# Altium PCB main_pcb_new_id.PcbDoc (part 1 of 2)
Units mil, origin at the board's own origin, x right, y up, seen from the top; angles counter-clockwise.
Board outline 3546.59 x 5237.31 mil, 2 copper layers (Top Layer, Bottom Layer); 111 components, 96 nets, 453 pads, 145 vias.
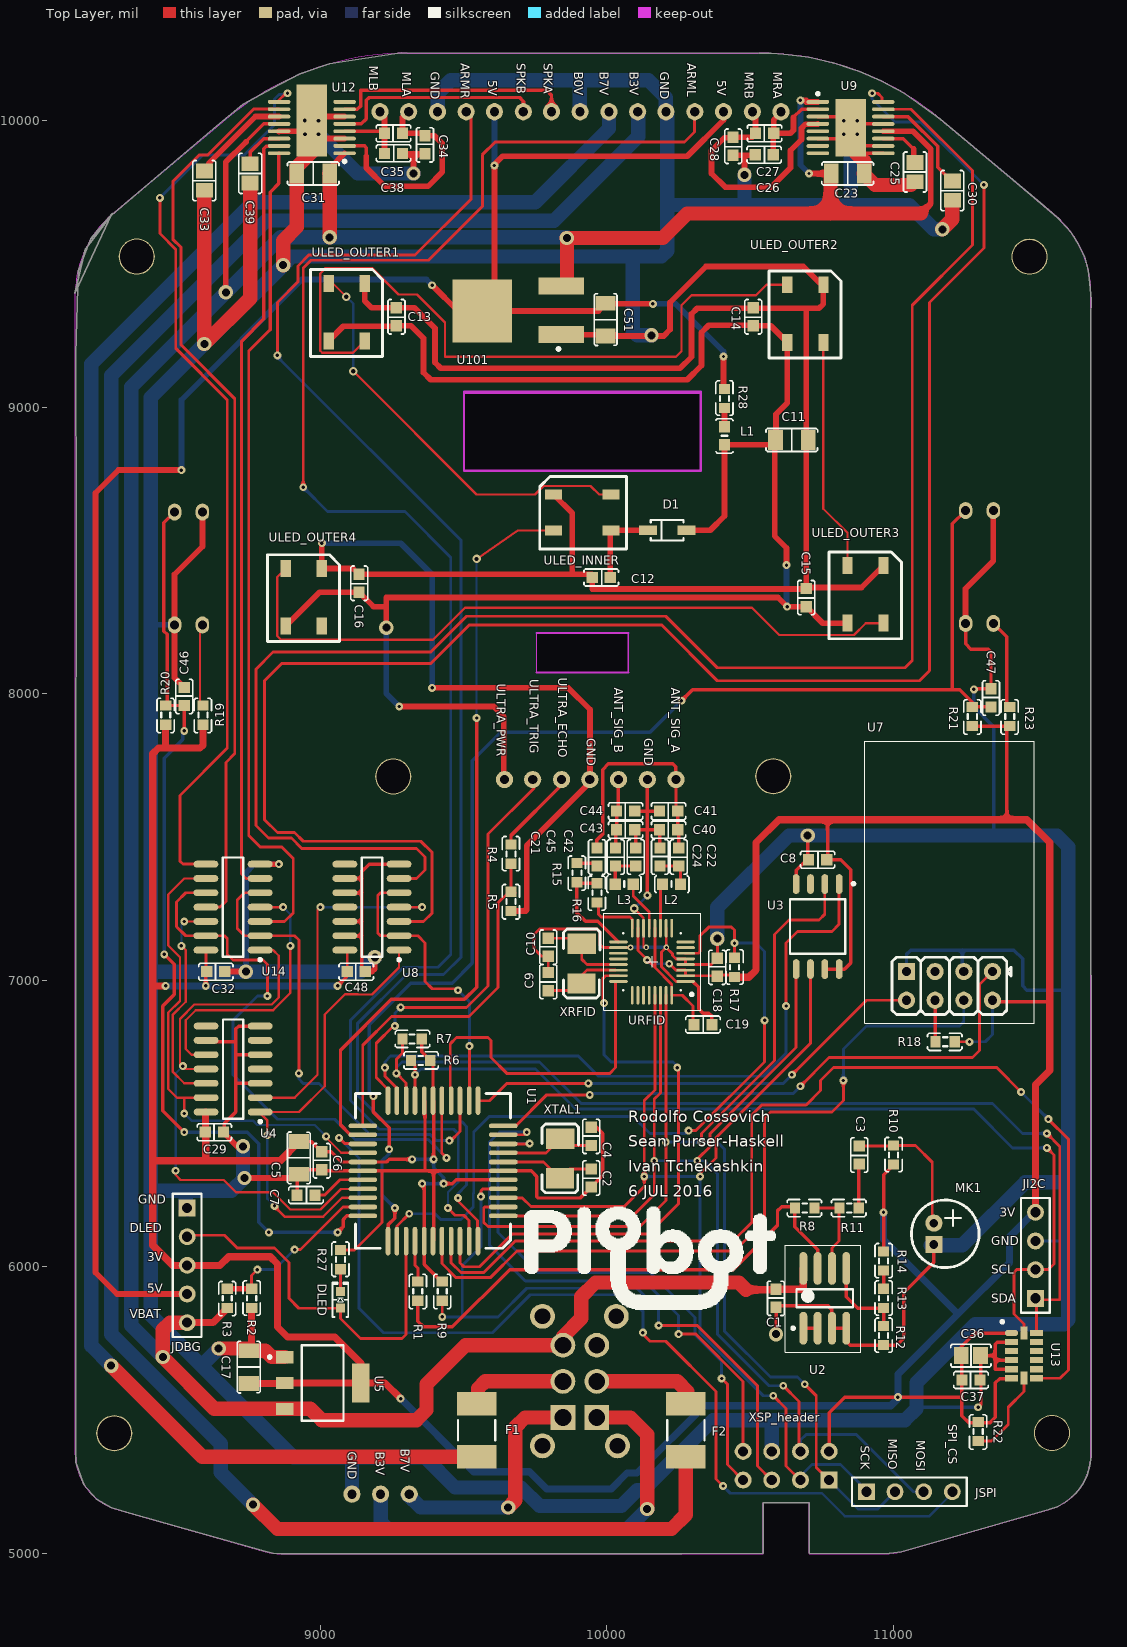
[diagram p0: Top Layer view]
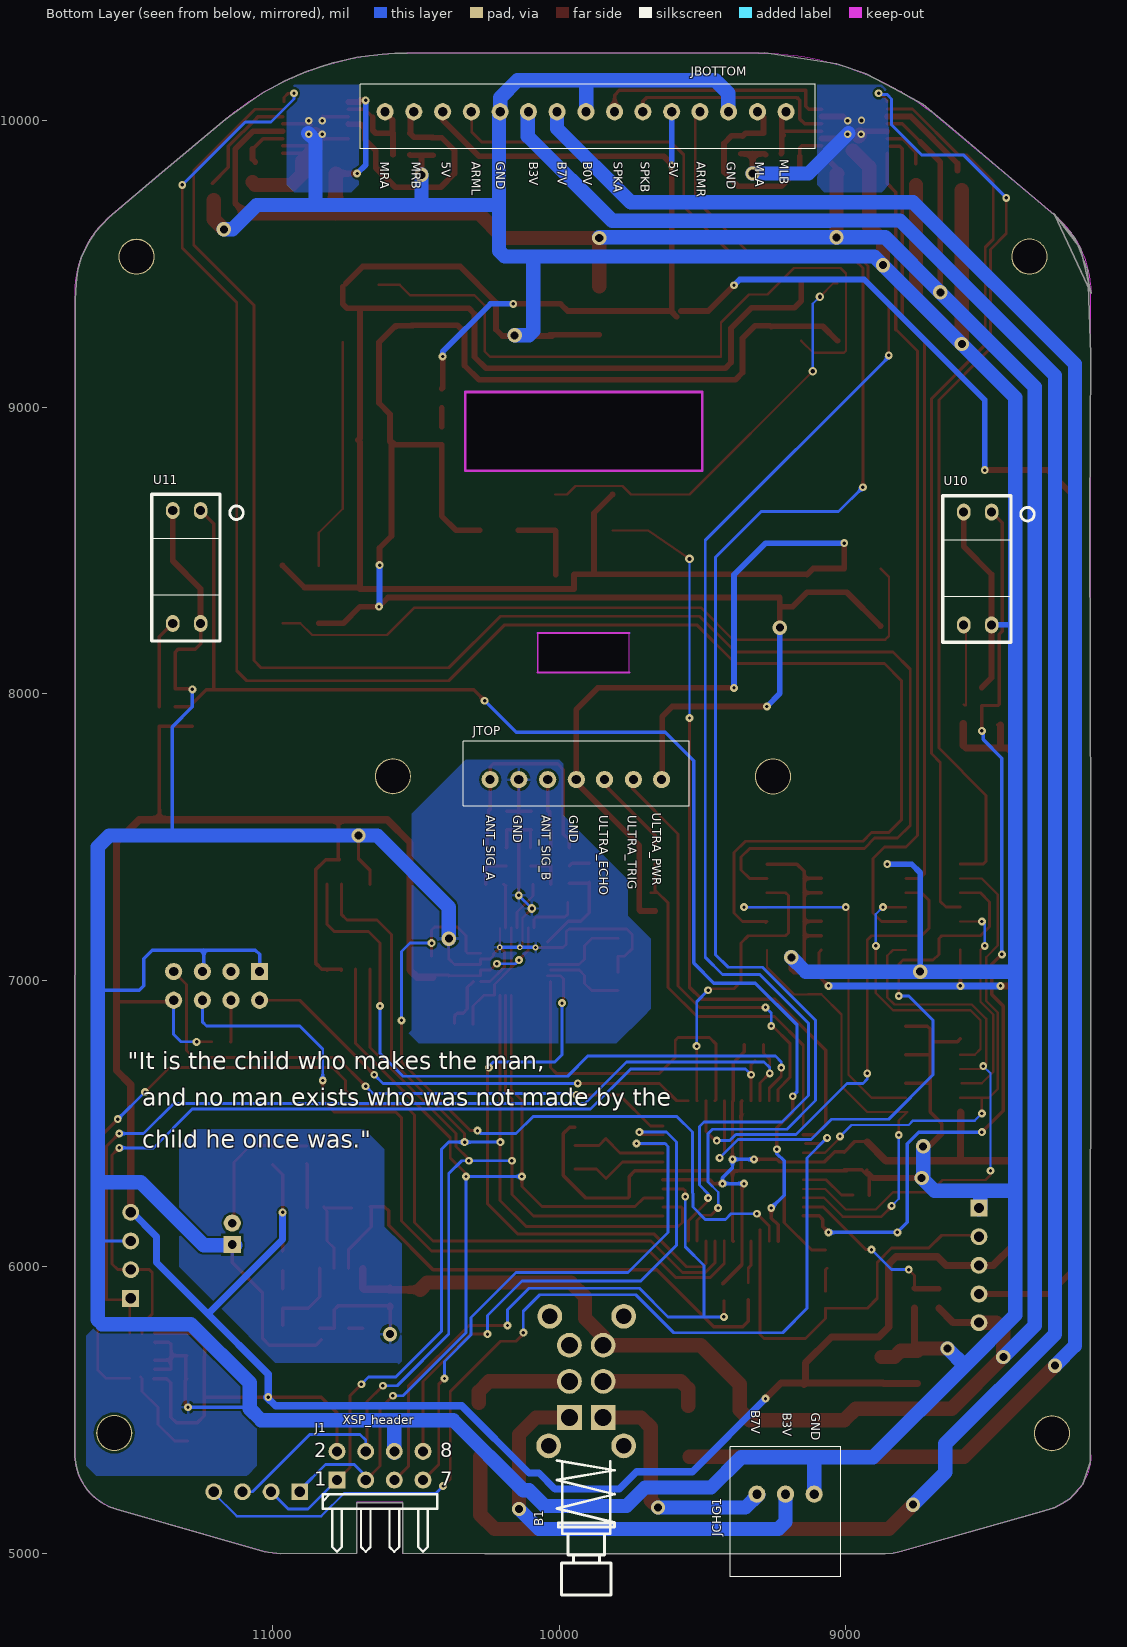
[diagram p1: Bottom Layer view, seen from below]

## Layer stack, top to bottom
Top Solder: solder mask 0.4, Solder Resist, Dk 3.5
Top Layer: signal copper 1.4
Dielectric1: dielectric 12.6, FR-4, Dk 4.8
Bottom Layer: signal copper 1.4
Bottom Solder: solder mask 0.4, Solder Resist, Dk 3.5

## Board outline
8143.2,9396.15 8179.07,9549.45 8271.79,9670.14 8637.89,9980.25 8730.23,10056.09 8832.48,10112.18 8928.41,10163.22 9031.25,10198.55 9282.58,10235.79 10529.94,10233.93 10572.83,10234.83 10617.21,10231.57 10662.22,10225.7 10705.76,10220.43 10794.61,10199.42 10837.6,10185.09 10784.1,10203.24 10856.7,10179.35 10879.63,10171.71 10956.26,10139.14 11038.17,10094.09 11163.57,10004.43 11395.9,9810.1 11513.6,9711.32 11570.35,9661.92 11617.19,9612.11 11644.89,9569.17 11667.92,9521.86 11679.71,9477.01 11684.85,9432.16 11689.02,9373.57 11688.53,9315.23 11688.04,9191.69 11688.53,8698.01 11689.79,5339.45 11685.15,5304.98 11675.77,5273.61 11661.37,5243.36 11644.62,5219.58 11633.58,5207.2 11622.53,5196.82 11597.75,5177.4 11571.63,5163.34 11544.58,5153.27 11028.88,5006.19 10971.98,4998.48 10705.76,5000.34 10705.76,5177.4 10625,5177.4 10545,5177.4 10545,5000.34 10260,4998.48 8861.77,4998.48 8834.18,5000.34 8806.48,5007.02 8720.49,5031.86 8527.51,5085.36 8323.76,5143.29 8271.65,5159.79 8218.67,5189.32 8173.51,5240.56 8146.93,5318.96 8145.68,7501.43 8147.94,8611.99 8145.68,9184.18 8154.7,9474.77 8199.05,9587.28 8273.52,9675.41 8180.13,9552.59 8145.22,9398.71 8271.66,9673.55
cut-out: 9501.22,9048.82 10327.99,9048.82 10326.01,8776.23 9501.32,8777.77
cut-out: 9755,8211.79 10075,8210 10075,8075 9755,8074

## Design rules (kind name [scope] priority, off if disabled: settings)
Clearance [All] p1: gap=8
FabricationTestpoint [(IsPad And (OnTopLayer Or OnBottomLayer))] p1: side=3 testpointundercomponent=TRUE minsize=40 maxsize=100 preferedsize=60 minholesize=0 maxholesize=40 preferedholesize=32 testpointgrid=1 allowsidetop=TRUE allowsidebottom=TRUE usegrid=TRUE gridtolerance=0.01
HoleSize [All] p1: absolutevalues=TRUE maxlimit=150 minlimit=1 maxpercent=80.000 minpercent=20.000
MinimumSolderMaskSliver [All] p1: minsoldermaskwidth=5
PolygonConnect [All] p1: connectstyle=Relief reliefconductorwidth=10 reliefentries=4 polygonreliefangle="90 Angle" airgapwidth=10
RoomDefinition main_pcb [InComponentClass('main_pcb')] p1 off: confinementstyle=ConfineIn formatcopy=TRUE lockcomponents=FALSE outline 11735,5015 11930,5015 11930,5255 11735,5255
RoutingVias [All] p1: holewidth=11.81 width=27.56 viastyle="Through Hole" minholewidth=3.94 minwidth=3.94 maxholewidth=28 maxwidth=50
SilkToSilkClearance [All] p1: silktosilkclearance=1
SilkToSolderMaskClearance [IsPad] p1: minsilkscreentomaskgap=1 clearancetoexposedcopper=TRUE
SolderMaskExpansion [All] p1: expansion=0
Width [All] p1: maxlimit=1000 minlimit=8 preferedwidth=10 minimp=50.000000 maximp=50.000000 favimp=50.000000
25 further rules are at their usual default settings.

## Components (designator, comment, footprint, x,y, rotation, side; value= is the part's Value field where it differs from the comment)
B1 "ON/OFF" KGPS22F03 9898.71,5604.03 r0 bottom
C1 "100nF" CAPC1608N 10590,5890 r270 top
C2 "18pF" CAPC1608N 9945,6310 r90 top
C3 "100nF" CAPC1608N 10880,6390 r90 top
C4 "18pF" CAPC1608N 9945,6455 r270 top
C5 "10 uF" CAPC3216N 8925,6380 r90 top
C6 "100nF" CAPC1608N 9005,6370 r270 top
C7 "100nF" CAPC1608N 8950,6250 r180 top
C8 "100nF" CAPC1608N 10735,7420 r180 top
C9 "15pF" CAPC1608N 9795,6995 r90 top
C10 "15pF" CAPC1608N 9795,7115 r270 top
C11 "10 uF" CAPC3216N 10645,8885 r0 top
C12 "100nF" CAPC1608N 9980,8405 r180 top
C13 "100nF" CAPC1608N 9265,9315 r90 top
C14 "100nF" CAPC1608N 10510,9315 r90 top
C15 "100nF" CAPC1608N 10695,8335 r90 top
C16 "100nF" CAPC1608N 9135,8385 r90 top
C17 "10uF" CAPC3216N 8750,5650 r90 top
C18 "100nF" CAPC1608N 10385,7045 r270 top
C19 "100nF" CAPC1608N 10335,6845 r180 top
C21 "100nF" CAPC1608N 9965,7430 r90 top
C22 "15pF" CAPC1608N 10250,7430 r90 top
C23 "10uF" CAPC3216N 10840,9815 r180 top
C24 "47pF" CAPC1608N 10185,7430 r270 top
C25 "10nF/16V" CAPC2012N 11075,9820 r90 top
C26 "100nF" CAPC1608N 10548.5,9880 r180 top
C27 "100nF" CAPC1608N 10550,9955 r0 top
C28 "100nF" CAPC1608N 10440,9910 r90 top
C29 "100nF" CAPC1608N 8630,6470 r0 top
C30 "2.2uF" CAPC2012N 11205,9755 r90 top
C31 "10uF" CAPC3216N 8975,9815 r0 top
C32 "100nF" CAPC1608N 8635,7030 r0 top
C33 "10nF/16V" CAPC2012N 8595,9790 r90 top
C34 "100nF" CAPC1608N 9365,9915 r270 top
C35 "100nF" CAPC1608N 9255,9955 r0 top
C36 "1uF" CAPC2012N 11270,5690 r0 top
C37 "100nF" CAPC1608N 11270,5605 r0 top
C38 "100nF" CAPC1608N 9255,9885 r180 top
C39 "2.2uF" CAPC2012N 8755,9815 r90 top
C40 "180pF" CAPC1608N 10215,7525 r0 top
C41 "10pF" CAPC1608N 10215,7590 r0 top
C42 "47pF" CAPC1608N 10100,7430 r90 top
C43 "180pF" CAPC1608N 10065,7525 r0 top
C44 "10pF" CAPC1608N 10065,7590 r0 top
C45 "15pF" CAPC1608N 10030,7430 r90 top
C46 "100nF" CAPC1608N 8525,7990 r270 top
C47 "100nF" CAPC1608N 11340,7985 r270 top
C48 "100nF" CAPC1608N 9125,7030 r0 top
C51 "10uF" CAPC3216N 9995,9305 r90 top
D1 "MBR0540" SOD123/X.85 10210,8570 r0 top
DLED "LED3" "LED 0603/1608 BLUE" 9070,5885 r90 top
F1 "miniSMDC260F/12" miniSMDC260F/12 9545,5430 r90 top
F2 "miniSMDC260F/12" miniSMDC260F/12 10275,5430 r90 top
J1 "XSP" HDR2X4H 10775,5255.85 r180 bottom locked
JBOTTOM "Header 15" B15B-XH-A 9430,10030.32 r90 bottom locked
JCHG1 "Charger" S3B-XH-A(LF)(SN) 9210,4990 r90 bottom locked
JDBG "Header 5" HDR1X5 8535,6205 r270 top
JI2C "Header 4" HDR1X4 11495,5890 r90 top
JSPI "Header 4" HDR1X4 10905,5215 r0 top
JTOP "Header 7" B7B-XH-A 8991.18,7833.86 r270 bottom
L1 "10uH" INDC1608N 10410,8900 r270 top
L2 "2.2uH" INDC1608N 10225,7335 r0 top
L3 "2.2uH" INDC1608N 10060,7335 r180 top
MK1 "Mic2" electret_6mm 11180,6115 r90 top
R1 "10k" RESC1608N 9340,5915 r270 top
R2 "10k" RESC1608N 8760,5890 r90 top
R3 "20k" RESC1608N 8675,5890 r270 top
R4 "10k" RESC1608N 9665,7440 r90 top
R5 "10K" RESC1608N 9665,7275 r270 top
R6 "10k" RESC1608N 9350,6720 r0 top
R7 "10k" RESC1608N 9320,6795 r0 top
R8 "100k" RESC1608N 10690,6205 r180 top
R9 "10k" RESC1608N 9425,5915 r270 top
R10 "3.3k" RESC1608N 11000,6390 r90 top
R11 "22" RESC1608N 10845,6205 r180 top
R12 "10k" RESC1608N 10965,5760 r90 top
R13 "10k" RESC1608N 10965,5890 r90 top
R14 "10k" RESC1608N 10965,6020 r90 top
R15 "820" RESC1608N 9965,7305 r270 top
R16 "5.1k" RESC1608N 9895,7375 r270 top
R17 "10k" RESC1608N 10445,7045 r90 top
R18 "10k" RESC1608N 11180,6785 r180 top
R19 "1K" RESC1608N 8590,7925 r270 top
R20 "5.1k" RESC1608N 8460,7925 r270 top
R21 "5.1k" RESC1608N 11275,7920 r270 top
R22 "10k" RESC1608N 11295,5425 r270 top
R23 "1K" RESC1608N 11405,7920 r270 top
R27 "470" RESC1608N 9070,6025 r90 top
R28 "1" RESC1608N 10410,9030 r90 top
U1 "MCU" atmega644p 9355,6345 r270 top
U2 "LM358D" LM358D 10760,5890 r90 top
U3 "W25Q64BVSIG" W25Q64BVSIG 10730,7190 r270 top
U4 "SN74HC04D" D014_N 8695.51,6690 r180 top
U5 "AZ1117CH-3.3" SOT223 8995,5605 r180 top
U7 "ESP8266" ESP8266 11135.88,6979.94 r90 top
U8 "SN74HC08D" D014_N 9180,7255 r180 top
U9 "DRV8833" DRV8833#1 10850,9975 r0 top
U10 "ITR9608" ITR9608 8562.62,8409.71 r180 bottom
U11 "ITR9608" ITR9608 11322.62,8414.71 r180 bottom
U12 "DRV8833" DRV8833#2 8970,9975 r180 top
U13 "ADXL345BCCZ" ADXL345 11455,5690 r0 top
U14 "SN74HC08D" D014_N 8695,7255 r180 top
U101 "AZ1084CD-5.0" AZ1084CD-5.0 9675.24,9335 r180 top
ULED_INNER "WS2812B" WS2812B 9915,8635 r180 top
ULED_OUTER1 "WS2812B" WS2812B 9095,9330 r90 top
ULED_OUTER2 "WS2812B" WS2812B 10695,9325 r90 top
ULED_OUTER3 "WS2812B" WS2812B 10905,8345 r90 top
ULED_OUTER4 "WS2812B" WS2812B 8945,8335 r90 top
URFID "MFRC52202HN1" MFRC52202HN1 10157.13,7064.53 r180 top
XRFID "7A-27.120MAAJ-T" XTAL 9925,7055 r90 top
XTAL1 "ABM7-8.000MHZ-D2Y-T" XTAL 9850,6375 r90 top

## Footprints (in the part's own frame and the unit in brackets; to place one, negate y for a bottom-side part, rotate by r counter-clockwise, add the part's x,y. Pads: shape width x height; smd on the part's side, far side on the other; paste and mask are expansions set on the pad)
ADXL345 [mm] "BGA, 14-Leads, Body 5.0x3.0mm,  Pitch 0.80mm"
  oct 1.145x0.55 smd: 1(-1.1,2)
  rect 1.145x0.55 smd: 2(-1.1,1.2) 3(-1.1,0.4) 4(-1.1,-0.4) 5(-1.1,-1.2) 6(-1.1,-2) 8(1.1,-2) 9(1.1,-1.2) 10(1.1,-0.4) 11(1.1,0.4) 12(1.1,1.2) 13(1.1,2)
  rect 0.6x1.145 smd: 7(0,-2) 14(0,2)
  silkscreen extent -2.05,2.88 -1.8,3.12, body extent -1.5,-2.5 1.5,2.5, height 1
atmega644p [mil]
  oval 16x100 smd: 1(167.45,282.95) 2(136.45,282.95) 3(104.45,282.95) 4(73.45,282.95) 5(41.45,282.95) 6(10.45,282.95) 7(-20.55,282.95) 8(-52.55,282.95) 9(-83.55,282.95) 10(-115.55,282.95) 11(-146.55,282.95) 23(-146.55,-207.05) 24(-115.55,-207.05) 25(-83.55,-207.05) 26(-52.55,-207.05) 27(-20.55,-207.05) 28(10.45,-207.05) 29(41.45,-207.05) 30(73.45,-207.05) 31(104.45,-207.05) 32(136.45,-207.05) 33(167.45,-207.05)
  oval 100x16 smd: 12(-234.55,194.95) 13(-234.55,163.95) 14(-234.55,131.95) 15(-234.55,100.95) 16(-234.55,68.95) 17(-234.55,37.95) 18(-234.55,6.95) 19(-234.55,-25.05) 20(-234.55,-56.05) 21(-234.55,-88.05) 22(-234.55,-119.05) 34(255.45,-119.05) 35(255.45,-88.05) 36(255.45,-56.05) 37(255.45,-25.05) 38(255.45,6.95) 39(255.45,37.95) 40(255.45,68.95) 41(255.45,100.95) 42(255.45,131.95) 43(255.45,163.95) 44(255.45,194.95)
  silkscreen extent -260,-232 280,308, body extent -183,-162 227,244, height 39
AZ1084CD-5.0 [mm] "D-PAK, 3-Pads, Body 6.2x6.7mm (max), IPC Low Density"
  rect 4x1.5 smd: 1(-4.2,2.1) 3(-4.2,-2.2)
  rect 5.25x5.6 smd: 2(2.8,0)
  silkscreen extent -4.08,3.24 -3.83,3.49, body extent -3.05,-3.35 3.15,3.35, height 2.38
B7B-XH-A [mil]
  round 60 hole 32: 1(133.86,-1249.61) 2(133.86,-1149.61) 3(133.86,-1048.82) 4(133.86,-948.82) 5(133.86,-850.39) 6(133.86,-749.61) 7(133.86,-651.18)
  silkscreen extent 0,-1343 226,-555
B15B-XH-A [mil]
  round 60 hole 32: 1(0,-222.05) 2(0,-122.05) 3(0,-21.26) 4(0,78.74) 5(0,177.17) 6(0,277.95) 7(0,376.38) 8(0,476.38) 9(0,577.17) 10(0,677.17) 11(0,775.59) 12(0,876.38) 13(0,976.38) 14(0,1077.17) 15(0,1177.17)
  silkscreen extent -130,-323 96,1264
CAPC1608N [mm]
  rect 1x1 smd: 1(-0.8,0) 2(0.8,0)
  silkscreen extent -1.52,-0.76 1.52,0.75, body extent -0.87,-0.48 0.87,0.48, height 0.85
CAPC2012N [mm]
  rect 1.3x1.5 smd: 1(-0.85,0) 2(0.85,0)
  silkscreen extent -1.78,-1.02 1.78,1.02, body extent -1.1,-0.72 1.1,0.72, height 1.1
CAPC3216N [mm] "Chip Capacitor, Body 3.2x1.6mm, IPC Medium Density"
  rect 1.3x1.8 smd: 1(-1.45,0) 2(1.45,0)
  silkscreen extent -2.29,-1.02 2.29,1.02, body extent -1.7,-0.9 1.7,0.9, height 1.35
D014_N [mm] "SOIC, 14-Leads, Body 8.7x3.9mm, Pitch 1.27mm, IPC Medium Density"
  oval 2.2x0.6 smd: 1(-2.4,3.81) 2(-2.4,2.54) 3(-2.4,1.27) 4(-2.4,0) 5(-2.4,-1.27) 6(-2.4,-2.54) 7(-2.4,-3.81) 8(2.4,-3.81) 9(2.4,-2.54) 10(2.4,-1.27) 11(2.4,0) 12(2.4,1.27) 13(2.4,2.54) 14(2.4,3.81)
  silkscreen extent -2.53,-4.4 0.9,4.78, body extent -1.95,-4.33 1.95,4.33, height 1.75
DRV8833#1 [mm]
  oval 2x0.35 smd: 1(-2.9,2.275) 2(-2.9,1.625) 3(-2.9,0.975) 4(-2.9,0.325) 5(-2.9,-0.325) 6(-2.9,-0.975) 7(-2.9,-1.625) 8(-2.9,-2.275) 9(2.9,-2.275) 10(2.9,-1.625) 11(2.9,-0.975) 12(2.9,-0.325) 13(2.9,0.325) 14(2.9,0.975) 15(2.9,1.625) 16(2.9,2.275)
  rect 2.7x5.08 smd: PP(0,0)
  silkscreen extent -3.02,2.88 -2.77,3.12, body extent -2.25,-2.55 2.25,2.55, height 1.2
DRV8833#2 [mm]
  oval 2x0.35 smd: 1(-2.9,2.275) 2(-2.9,1.625) 3(-2.9,0.975) 4(-2.9,0.325) 5(-2.9,-0.325) 6(-2.9,-0.975) 7(-2.9,-1.625) 8(-2.9,-2.275) 9(2.9,-2.275) 10(2.9,-1.625) 11(2.9,-0.975) 12(2.9,-0.325) 13(2.9,0.325) 14(2.9,0.975) 15(2.9,1.625) 16(2.9,2.275)
  rect 2.7x6.35 smd: PP(0,-0.635)
  silkscreen extent -3.03,2.88 -2.78,3.12, body extent -2.25,-2.55 2.25,2.55, height 1.2
electret_6mm [mil]
  round 60 hole 30: 1(37.4,39.37)
  rect 60x60 hole 30: 2(-37.4,39.37)
  silkscreen extent -118,-118 118,118
ESP8266 [mil]
  round 60 hole 32: CH_PD(-49.94,-9.12) GPIO0(50.06,-109.12) GPIO2(50.06,-9.12) RST(-49.94,-109.12) RXD(50.06,-209.12) TXD(-49.94,90.88) VCC(-49.94,-209.12)
  rect 60x60 hole 32: GND(50.06,90.88)
  silkscreen extent -130,-354 854,236, body extent -94,-248 91,130, height 315
HDR1X4 [mm] "Connector; Header; 4 Position"
  rect 1.5x1.5 hole 0.9: 1(0,0)
  round 1.5 hole 0.9: 2(2.54,0) 3(5.08,0) 4(7.62,0)
  silkscreen extent -1.27,-1.27 8.89,1.27
HDR1X5 [mm] "Connector; Header; 5 Position"
  rect 1.5x1.5 hole 0.9: 1(0,0)
  round 1.5 hole 0.9: 2(2.54,0) 3(5.08,0) 4(7.62,0) 5(10.16,0)
  silkscreen extent -1.27,-1.27 11.43,1.27
HDR2X4H [mm] "Connector; Header; 4x2 Position; Right Angle"
  rect 1.5x1.5 hole 0.9: 1(0,0)
  round 1.5 hole 0.9: 2(0,2.54) 3(2.54,0) 4(2.54,2.54) 5(5.08,0) 6(5.08,2.54) 7(7.62,0) 8(7.62,2.54)
  silkscreen extent -1.27,-6.35 8.89,-1.27
INDC1608N [mm]
  rect 1x1 smd: 1(-0.8,0) 2(0.8,0)
  silkscreen extent -1.49,-0.76 1.56,0.76, body extent -0.87,-0.48 0.87,0.48, height 0.71
ITR9608 [mm]
  oval 1.2x1.5 hole 0.8: 1(-0.651,-4.316) 2(1.816,-4.316) 3(1.816,5.684) 4(-0.651,5.684)
  silkscreen extent -2.5,-5.87 5.6,7.13, body extent -2.42,-5.82 3.58,7.18, height 10
KGPS22F03 [mm]
  round 2.2 hole 1.4: 0(-3.146,-5.666) 0(-3.146,5.814) 0(3.399,-5.666) 0(3.5,5.814)
  rect 2.2x2.2 hole 1.5: 1(-1.334,3.296) 6(1.666,3.296)
  round 2.2 hole 1.5: 2(-1.334,0.096) 3(-1.334,-3.104) 4(1.666,-3.104) 5(1.666,0.096)
  silkscreen extent -2.32,7.12 2.76,19.04, body extent -3.15,-5.7 3.5,19, height 9
"LED 0603/1608 BLUE" [mm] "Chip Diode, 2-Leads, Body 1.60x0.80mm, IPC Medium Density"
  rect 0.8x0.8 smd: 1(-0.75,0) 2(0.75,0)
  silkscreen extent -1.52,-0.7 1.52,0.7, body extent -0.8,-0.4 0.8,0.4, height 0.53
LM358D [mm] "SOIC, 8-Leads, Body 5.0x4.0mm (max), Pitch 1.27mm, IPC Low Density"
  oval 2.9x0.7 smd: 1(-2.65,1.905) 2(-2.65,0.635) 3(-2.65,-0.635) 4(-2.65,-1.905) 5(2.65,-1.905) 6(2.65,-0.635) 7(2.65,0.635) 8(2.65,1.905)
  silkscreen extent -4.8,-3.2 4.7,3.5, body extent -2,-2.5 2,2.5, height 1.75
MFRC52202HN1 [mm] "QFN, 32-Leads, Body 5.1x5.1mm (max), Pitch 0.50mm, IPC Low Density"
  oval 1.65x0.25 smd: 1(-2.975,1.75) 2(-2.975,1.25) 3(-2.975,0.75) 4(-2.975,0.25) 5(-2.975,-0.25) 6(-2.975,-0.75) 7(-2.975,-1.25) 8(-2.975,-1.75) 17(2.975,-1.75) 18(2.975,-1.25) 19(2.975,-0.75) 20(2.975,-0.25) 21(2.975,0.25) 22(2.975,0.75) 23(2.975,1.25) 24(2.975,1.75)
  oval 0.25x1.65 smd: 9(-1.75,-2.975) 10(-1.25,-2.975) 11(-0.75,-2.975) 12(-0.25,-2.975) 13(0.25,-2.975) 14(0.75,-2.975) 15(1.25,-2.975) 16(1.75,-2.975) 25(1.75,2.975) 26(1.25,2.975) 27(0.75,2.975) 28(0.25,2.975) 29(-0.25,2.975) 30(-0.75,2.975) 31(-1.25,2.975) 32(-1.75,2.975)
  silkscreen extent -4.3,-4.3 4.3,4.3, body extent -2.55,-2.55 2.55,2.55, height 1
miniSMDC260F/12 [mm] "Chip Capacitor, 2-Leads, Body 5.3x3.2mm, IPC Low Density"
  rect 2.1x3.5 smd: 1(-2.35,0) 2(2.35,0)
  silkscreen extent -0.9,-1.65 0.9,1.65, body extent -2.75,-1.71 2.75,1.7, height 1.52
RESC1608N [mm]
  rect 0.9x1 smd: 1(-0.85,0) 2(0.85,0)
  silkscreen extent -1.49,-0.76 1.56,0.76, body extent -0.85,-0.48 0.85,0.48, height 0.6
S3B-XH-A(LF)(SN) [mil]
  round 60 hole 32: 1(216.54,-100) 2(216.54,0) 3(216.54,100)
  silkscreen extent -71,-193 382,193
SOD123/X.85 [mm] "SOD-123; 2 Leads; Body 2.7 x 1.6 mm, (LxW)"
  rect 1.6x0.85 smd: 1(-1.7,0) 2(1.7,0)
  silkscreen extent -1.45,-0.9 1.45,0.9
SOT223 [mm]
  rect 1.55x1.1 smd: 1(3.045,-2.031) 2(3.045,0.269) 3(3.045,2.569)
  rect 1.55x3.45 smd: 2(-3.705,0.269)
  silkscreen extent -2.18,-3.08 4.49,3.62, body extent -2.11,-3.01 1.49,3.59, height 4
W25Q64BVSIG [mm]
  oval 1.75x0.6 smd: 1(-3.697,2.033) 2(-3.697,0.763) 3(-3.697,-0.507) 4(-3.697,-1.777) 5(3.839,-1.777) 6(3.839,-0.507) 7(3.839,0.763) 8(3.839,2.033)
  silkscreen extent -3.86,-2.32 2.48,3.43, body extent -2.29,-2.34 2.51,2.52, height 0.8
WS2812B [mm]
  rect 1.5x0.9 smd: 1(-2.519,1.678) 2(-2.519,-1.522) 3(2.581,-1.522) 4(2.581,1.678)
  silkscreen extent -3.9,-3.1 3.8,3.3, body extent -2.52,-2.42 2.48,2.58, height 0.6
XTAL [mm]
  rect 1.8x2.5 smd: 1(1.834,0.329) 2(-1.691,0.354)
  silkscreen extent -2.97,-1.27 3.13,1.95, body extent -2.2,-0.89 2.49,1.4, height 2.54

## Part data
B1: library part Component_1
C1 C2 C3 C4 C8 C10 C12 C13 C14 C15 C16 C21 C25 C29 C30 C32 C33 C37 C48: library part Cap, "Capacitor"
C5 C11 C17 C23 C31 C36 C39 C51: library part Cap_2, "Capacitor"
C6 C7 C9 C18 C19 C22 C24 C26 C27 C28 C34 C35 C38 C40 C41 C42 C43 C44 C45 C46 C47: library part CAP, "Capacitor"
D1: library part Diode, "Default Diode"
DLED: "Typical BLUE SiC LED"
F1 F2: library part "Fuse Thermal", "Thermal Fuse"
J1: library part "Header 4X2H", "Header, 4-Pin, Dual row, Right Angle"
JBOTTOM: "Header, 15-Pin"
JCHG1: library part BATTCON
JDBG: "Header, 5-Pin"
JI2C JSPI: "Header, 4-Pin"
JTOP: "Header, 7-Pin"
L1 L2 L3: library part Inductor, "Inductor"
MK1: "Microphone"
R1 R2 R3 R4 R5 R6 R7 R8 R9 R10 R11 R12 R13 R14 R15 R16 R17 R18 R19 R20 R21 R22 R23 R27 R28: library part Res2, "Resistor"
U1: library part ATmega644-20AU, "8-bit AVR Microcontroller, 2.7-5.5V, 20MHz, 64KB Flash, 2KB EEPROM, 4KB SRAM, 44-pin TQFP"
U2: "Dual Operational Amplifier"
U4: "Hex Inverter"
U5: library part LM1117
U8 U14: "Quadruple 2-Input Positive-AND Gate"
U13: library part ADXL345
XRFID: library part Tm08B.S01_12M_42

## Free pads (board coordinates)
  round 125.98 hole 118.11: 7(8280.6,5419.13) 8(11552.53,5420.01) 9(11474.54,9524.56) 10(8359.1,9524.83) 11(9254.16,7710.99) 12(10580.26,7711.48)

## Via types
v1: diameter 27.56, hole 11.81, Top Layer to Bottom Layer, 105 vias
v2: diameter 50, hole 28, Top Layer to Bottom Layer, 23 vias
v3: diameter 25.98, hole 12.99, Top Layer to Bottom Layer, tented top, 7 vias
v4: diameter 30, hole 15, Top Layer to Bottom Layer, 4 vias
v5: diameter 20, hole 10, Top Layer to Bottom Layer, 3 vias
v6: diameter 27.6, hole 11.81, Top Layer to Bottom Layer, 2 vias
v7: diameter 25.98, hole 12.99, Top Layer to Bottom Layer, 1 vias

## Nets (pads, with @x,y where several pads share a name; then routed paths per layer and width w, separated by ;. In a path a pad name is that pad's centre, name@x,y a point inside that pad or via, vN(x,y) a via of type N, cw(c..) or ccw(c..) an arc to the next point about the centre after c; other vN are vias at no path point)
ANT_GND: C1.2 C2.1 C4.1 C5.1 C6.2 C7.2 C8.2 C9.2 C10.2 C11.2 C12.2 C13.2 C14.2 C15.2 C16.2 C17.2 C18.1 C19.1 C23.1 C24.1 C25.1 C26.2 C28.1 C29.2 C30.1 C31.1 C32.2 C33.1 C34.2 C36.2 C37.2 C38.1 C39.1 C40.1 C41.1 C42.2 C43.2 C44.2 C46.1 C47.1 C48.2 C51.1 J1.6 JBOTTOM.3 JBOTTOM.8 JBOTTOM.11 JCHG1.1 JDBG.1 JI2C.3 JTOP.2 JTOP.4 MK1.2 R2.1 R5.2 R12.1 R27.2 U1.6 U1.18 U1.28 U1.39 U2.3 U2.4 U3.4 U4.3 U4.5 U4.7 U4.9 U5.1 U7.GND U7.GPIO0 U8.7 U8.9 U8.10 U8.12 U8.13 U9.3 U9.6 U9.9 U9.10 U9.13 U9.PP U10.2 U10.4 U11.2 U11.4 U12.3 U12.6 U12.13 U12.PP U13.2 U13.4 U13.5 U14.7 U101.1 ULED_INNER.3 ULED_OUTER1.3 ULED_OUTER2.3 ULED_OUTER3.3 ULED_OUTER4.3 URFID.1 URFID.4 URFID.5 URFID.10 URFID.14 URFID.18 | length 42454.1
  Top Layer w8: v4(10095,7250) 10127.6,7217.4 URFID.14@10127.6,7181.65 10127.6,7115 10128.07,7114.53 v5(10137.13,7114.53) ; v5@10206.34,7114.53 URFID.10@10206.34,7181.65
  Top Layer w10: C5.1@8925,6338.5 C5.1@8928.5,6335 ; R27.2@9070,6058.46 9118.46,6058.46 9215,6155 ; 9770,7085 9745,7110 9745,7160 9764.18,7179.18 9965.82,7179.18 9975,7170 9975,7125 9986.26,7113.74 URFID.18@10040,7113.74 v5(10082.13,7113.74) ; 9771.5,7083.5 C10.2@9795,7083.5 C9.2@9795,7026.5 ; URFID.1@10274.25,6995.63 10241.03,6995.63 10190,7046.66 10190,7098.19 10206.34,7114.53 10228.77,7092.09 10228.77,7086.63 10241.03,7074.37 URFID.5@10274.25,7074.37 URFID.4@10274.25,7054.69 10364.69,7054.69 C18.1@10385,7075 ; C18.1@10385,7076.5 v2(10385,7145)
  Top Layer w12: U4.9@8600,6795 8610,6785 8705,6785 ; C29.2@8665,6465 8665,6500 8705,6540 8705,6640 ; U4.3@8790,6640 8705,6640 ; U4.5@8790,6740 8705,6740 ; U4.7@8790,6840 8715,6840 8705,6830 8705,6785 ; C7.2@8918.5,6250 C5.1@8918.5,6322.91 ; C5.1@8926.46,6321.46 8943.5,6338.5 C6.2@9005,6338.5 ; C6.2@8995.45,6334.55 U1.28@9147.95,6334.55 9215,6334.55 ; U8.13@9085.51,7155 9145,7155 ; U8.12@9085.51,7205 9145,7205 ; U8.10@9085.51,7305 9145,7305 ; U8.9@9085.51,7355 9145,7355 ; C48.2@9153.25,7026.75 9145,7035 9145,7155 ; 9215,6155 9215,6334.55 ; U8.7@9274.49,7405 9170,7405 9145,7380 9145,7355 ; U1.18@9361.95,6579.55 9365,6576.5 9365,6334.55 ; U1.39@9392.95,6089.55 9395,6091.6 9395,6334.55 ; C4.1@9945,6486.5 9963.5,6486.5 9985,6465 9985,6318.5 C2.1@9945,6278.5 9906.5,6240 9760,6240 9755,6245 9755,6315 9735.45,6334.55 U1.6@9637.95,6334.55 9395,6334.55 ; C44.2@10096.5,7590 10140.81,7590 ; C42.2@10100,7461.5 10100,7521.5 C43.2@10096.5,7525 10140.81,7525 ; v1(10140.81,7295.81) 10140.81,7525 ; JTOP.2@10145,7695 10140.81,7690.81 10140.81,7590 ; C41.1@10183.5,7590 10140.81,7590 ; C24.1@10185,7461.5 10183.5,7462.99 C40.1@10183.5,7525 10140.81,7525 ; URFID.1@10300,6995 10320,6975 10320,6900 10335,6885 10355,6885 10365,6875 C19.1@10365,6850 ; v2(10590,5765) C1.2@10590,5858.5 ; C1.2@10590,5863.26 10771.74,5863.26 10785,5850 U2.3@10785,5785.67 U2.4@10835,5785.67 ; U3.4@10660.04,7335.54 10660.04,7383.54 10700,7423.5 v2(10700,7505) ; U9.6@10735.83,9936.61 10818.39,9936.61 U9.PP@10820,9935 ; U9.3@10735.83,10013.39 10823.39,10013.39 U9.PP@10825,10015 ; U2.4@10830,5745 10848.46,5726.54 R12.1@10965,5726.54 11011.54,5726.54 11035,5750 11035,5910 11140,6015 MK1.2@11140,6080 ; U9.PP@10865,9985 10867.8,9987.8 U9.13@10964.17,9987.8 ; U9.PP@10870,9885 10870.43,9885.43 U9.9@10964.17,9885.43 ; U9.PP@10876.02,9911.02 U9.10@10964.17,9911.02 ; U11.2@11251.12,8244.77 11251.12,8173.88 11270,8155 11330,8155 11340,8145 C47.1@11340,8016.5 11281.5,8016.5 v1(11280,8015) ; v1(11295,5510) 11305,5520 11305,5605 11303.25,5606.75 C37.2@11300,5610 ; C36.2@11300,5690 C36.2@11303.46,5690 ; C37.2@11301.5,5605 11303.46,5606.97 C36.2@11303.46,5690 ; U13.2@11409.45,5735 U13.2@11411.69,5737.24 11362.24,5737.24 11354.25,5729.25 11354.25,5690 ; U13.5@11411.69,5642.76 11354.25,5642.76 11354.25,5674.25 ; U13.4@11411.69,5674.25 11354.25,5674.25 ; JI2C.3@11487.6,6077.6 JI2C.3@11505,6095 ; 8705,6640 8705,6740 ; 8705,6740 8705,6785 ; 9145,7155 9145,7205 ; 9145,7205 9145,7305 ; 9145,7305 9145,7355 ; 9215,6334.55 9365,6334.55 ; 9365,6334.55 9395,6334.55 ; 10140.81,7525 10140.81,7590 ; C36.2@11303.46,5690 11354.25,5690 ; 11354.25,5674.25 11354.25,5690
  Top Layer w20: C46.1@8525,8021.5 8491.12,8055.38 U10.2@8491.12,8239.77 8491.12,8416.12 8588.25,8513.25 U10.4@8588.25,8633.47 ; C29.2@8665,6465 8710,6420 v2(8730,6420) ; C32.2@8666.5,7030 v2(8740,7030) ; v2(8735,6310) 8905,6310 C5.1@8920,6325 ; U14.7@8789.49,7405 v1(8855,7405) ; U12.13@8855.13,9961.5 U12.13@8855.83,9962.2 8937.8,9962.2 U12.PP@8945,9955 ; U12.PP@8990,9995 9008.39,10013.39 U12.6@9084.17,10013.39 ; v3(8993.62,9951.38) 9008.39,9936.61 U12.3@9084.17,9936.61 ; v1(9005,8525) 9004.92,8524.92 ULED_OUTER4.3@9004.92,8436.61 9113.39,8436.61 C16.2@9135,8415 ; C16.2@9135,8416.5 9880,8416.5 ; ULED_OUTER1.3@9154.92,9431.61 9154.92,9370.08 9178.5,9346.5 C13.2@9265,9346.5 9328.5,9346.5 9400,9275 9400,9155 9420,9135 10255,9135 10295,9175 10295,9325 10315,9345 10695,9345 ; C48.2@9160,7030 9180,7030 9190,7040 v2(9190,7080) ; C38.1@9280,9880 9283.5,9883.5 9325,9883.5 ; v2@9325,9810 v2(9325,9815) 9325,9883.5 ; C34.2@9365,9883.5 9325,9883.5 ; v1(9390,8020) 9865,8020 9940.39,7944.61 JTOP.4@9940.39,7700.39 ; R5.2@9665,7241.54 9716.54,7241.54 9720,7245 ; 9715,7245 9720,7250 9720,7470 9940,7690 JTOP.4@9940,7700 JTOP.4@9940.39,7700.39 ; ULED_INNER.3@9813.39,8694.92 9878.5,8629.8 9878.5,8417.99 9880,8416.5 ; U101.1@9860.35,9252.32 10032.68,9252.32 ; JTOP.4@9945,7705 JTOP.4@9940.39,7700.39 ; C51.1@10025,9247.91 v2@10150,9247.91 ; v2(10155,9250) v2@10150,9247.91 ; C28.1@10440,9878.5 10480,9878.5 ; v2(10480,9810) 10480,9878.5 ; C26.2@10520,9880 10518.5,9878.5 10480,9878.5 ; C15.2@10695,8365 C15.2@10700,8370 ; C11.2@10700,8885 10695,8890 10695,9345 ; C11.2@10702.09,8885 10695,8877.91 10695,8375 C15.2@10700,8370 ; ULED_OUTER2.3@10745,9430 10685,9490 10345,9490 10220,9365 10220,9270 10197.91,9247.91 v2@10150,9247.91 ; ULED_OUTER2.3@10755,9420 10755,9360 10740,9345 10695,9345 ; ULED_OUTER3.3@10964.92,8446.61 10888.31,8370 C15.2@10700,8370 ; U11.2@11251.12,8244.77 11251.12,8366.12 11348.25,8463.25 U11.4@11348.25,8635.22 ; 9880,8416.5 9947.01,8416.5 9948.5,8415 9948.5,8365 10690.43,8365 10693.46,8368.03 C15.2@10695,8366.5 10698.5,8370 C15.2@10700,8370
  Top Layer w25: C17.2@8760,5710 R2.1@8760,5856.54 ; C1.2@10590,5858.5 C1.2@10590,5863.26
  Top Layer w50: C33.1@8595,9756.54 v2(8595,9220) 8755,9380 C39.1@8755,9775 ; v2(8645,5715) 8755,5715 C17.2@8760,5710 ; C17.2@8750,5707.09 8807.91,5707.09 8830,5685 U5.1@8875,5685 ; v2(8870,9495) 8870,9580 8917.91,9627.91 8917.91,9837.91 U12.PP@8975,9895 ; U12.PP@8950,9950 U12.PP@8955,9945 ; JBOTTOM.8@9905,10028.94 JBOTTOM.8@9906.38,10030.32 ; U9.PP@10850,9951.38 10850,9905 10870,9885 10897.09,9857.91 C23.1@10897.09,9815 ; C23.1@10895,9815 10935,9775 11060,9775 C25.1@11070,9785 ; v2(11170,9620) 11205,9655 C30.1@11205,9721.54
  Bottom Layer w10: v4(10095,7250) v1(10140.81,7295.81)
  Bottom Layer w12: v5(10082.13,7113.74) 10086.34,7113.74 10087.13,7114.53 v5(10137.13,7114.53) v5(10207.13,7114.53) ; v2(10590,5765) v2@10605,5765 ; U7.GND@11045,7030 11045,7090 11060,7105 11240,7105 ; 11080,5505 11085,5510 v1(11295,5510) ; U7.GPIO0@11245,7020 11240,7025 11240,7105 ; v1(11280,8015) 11280,7953.54 11350,7883.54 11350,7505 ; JI2C.3@11495,6090 11590,6090 11600,6100 ; 11610,6965 11465,6965 11450,6980 11450,7075 11420,7105 11240,7105
  Bottom Layer w20: 8408.22,8240 U10.2@8495,8240 ; v2(8740,7030) 8740,7375 8770,7405 v1(8855,7405) ; v1(9005,8525) 9280,8525 9390,8415 v1(9390,8020)
  Bottom Layer w50: JDBG.1@8535,6200 8530,6205 8530,6265 ; v2(8645,5715) 8585,5655 ; v2(8730,6420) 8730,6315 v2(8735,6310) 8690,6265 8530,6265 ; v3@8990,9955 v3(8993.62,9951.38) 9130,9815 v2(9325,9815) ; JCHG1.1@9110,5206.54 9110,5335 ; v2(9190,7080) 9140,7030 v2(8740,7030) 8413.22,7030 8408.22,7025 ; JBOTTOM.3@9410,10030 9410,10095 9455,10140 9905,10140 ; JBOTTOM.8@9905,10030 9905,10140 ; 10090,9525 10090,9265 10105,9250 v2(10155,9250) ; JBOTTOM.11@10205.59,10030.32 10205.59,10079.41 10145,10140 9905,10140 ; JBOTTOM.11@10210,10025 10210,9705 ; v2(10385,7145) 10385,7255 10635,7505 v2(10700,7505) 11350,7505 11570,7505 11610,7465 11610,6965 11610,6295 ; v2(10480,9810) 10480,9705 ; J1.6@10575,5350 J1.6@10575,5355.85 10575,5465 ; v3@10875,9955 10850,9930 10850,9705 ; MK1.2@11130,6075 11240,6075 11460,6295 11610,6295 ; v2(11170,9620) 11140,9620 11055,9705 10850,9705 ; 8408.22,6265 8530,6265 ; 8408.22,6265 8408.22,7025 ; 8408.22,6265 8408.22,5831.78 8585,5655 ; 8408.22,7025 8408.22,8240 8408.22,9033.22 v2(8595,9220) v2(8870,9495) 8900,9525 10190,9525 10210,9545 10210,9705 ; 8585,5655 8905,5335 9110,5335 ; 9110,5335 9365,5335 9470,5230 9700,5230 9765,5165 10050,5165 10105,5220 10125,5220 10370,5465 10575,5465 ; 10210,9705 10480,9705 ; 10480,9705 10850,9705 ; 10575,5465 11040,5465 11080,5505 11080,5595 11285,5800 11595,5800 11610,5815 11610,6295
  other v3: 8946.38,9951.38 10826.38,9951.38 10873.62,9951.38 8993.62,9998.62 10826.38,9998.62 10873.62,9998.62
  other v7: 8945,10000
ANT_SIGA: C21.2 C22.2 C40.2 C41.2 JTOP.1 | length 846.3
  Top Layer w12: C21.2@9965,7461.5 9965,7490 9985,7510 9985,7735 10005,7755 10230,7755 10240,7745 JTOP.1@10240,7695 ; JTOP.1@10240.79,7700 10240.79,7594.21 C41.2@10245,7590 ; C41.2@10241.18,7598.82 C41.2@10245,7595 ; C41.2@10246.5,7590 C40.2@10246.5,7525 10250,7521.5 C22.2@10250,7461.5
ANT_SIGB: C43.1 C44.1 C45.2 JTOP.3 | length 247
  Top Layer w12: C45.2@10030,7461.5 10030,7521.5 C43.1@10033.5,7525 C44.1@10033.5,7590 ; C44.1@10035,7585 10040,7590 JTOP.3@10040,7700
ARM_SERVO_L: JBOTTOM.12 U1.43 | length 6085.4
  Top Layer w10: v1(8940,8720) 8940,9485 8967,9512 9377,9512 9565,9700 9565,9880 9610,9925 10270,9925 10305,9960 JBOTTOM.12@10305,10025 ; v6(9445,6205) 9470,6180 9500,6180 9518.95,6161.05 U1.43@9518.95,6089.55
  Bottom Layer w8: v6(9445,6205) 9445,6260 9480.78,6295.78
  Bottom Layer w10: v1(8940,8720) 9025,8635 9295,8635 9455,8475 9455,7090 9410,7045 9290,7045 9105,6860 9105,6580 9205,6480 9465,6480 9480.78,6464.22 9480.78,6295.78
ARM_SERVO_R: JBOTTOM.4 U1.44 | length 5292.9
  Top Layer w8: U1.44@9548,6091.5 U1.44@9549.95,6089.55
  Top Layer w10: v1(8850,9180) 8850,9365 8922,9437 8922,9492.46 8959.54,9530 9330,9530 9525,9725 9525,10014.06 JBOTTOM.4@9508.74,10030.32 ; v1(9480,6240) 9480,6230 9548,6162 U1.44@9548,6091.5
  Bottom Layer w8: v1@8850,9175 v1(8850,9180)
  Bottom Layer w10: v1@8850,9175 9490,8535 9490,7080 9430,7020 9300,7020 9130,6850 9130,6597.5 9222.5,6505 9495,6505 9510,6490 9510,6285 9480,6255 v1(9480,6240)
BATT_SENSE: R2.2 R3.1 U1.32 | length 617.4
  Top Layer w10: R2.2@8760,5925 8760,5970 v1(8780,5990) ; v1(8910,6060) 8930,6060 9078.55,6208.55 U1.32@9147.95,6208.55
  Top Layer w20: R3.1@8675,5923.46 8758.46,5923.46 R2.2@8760,5925
  Bottom Layer w10: v1(8780,5990) 8840,5990 v1(8910,6060)
CS_FLASH: U1.21 U3.1 | length 2360.7
  Top Layer w10: v1(9225,6695) 9225,6665 9266.95,6623.05 U1.21@9266.95,6579.55 ; v1(10625,6910) 10625,7130 10665,7170 10785,7170 10810.04,7195.04 U3.1@10810.04,7335.54
  Bottom Layer w10: v1(9225,6695) 9225,6715 9245,6735 9900,6735 9970,6665 10545,6665 10625,6745 v1(10625,6910)
CS_RFID_13: U1.15 URFID.24 | length 1180.8
  Top Layer w10: U1.15@9455.95,6579.55 9453.22,6582.28 9453.22,6778.22 9475,6800 9585,6800 9595,6790 9595,6730 9650,6675 10010,6675 10030,6695 URFID.24@10030,6995
DBG_LED: DLED.1 JDBG.2 U1.36 | length 1378.1
  Top Layer w10: JDBG.2@8535,6110 8665,6110 8710,6065 8840,6065 8890,6015 8890,5890 8924.53,5855.47 DLED.1@9070,5855.47 9070,5820 9140,5750 9285,5750 9298.95,5763.95 U1.36@9298.95,6089.55 U1.36@9298.95,6129.25
INT_ACCEL: U1.41 U13.8 | length 3812.1
  Top Layer w10: U1.41@9455.95,6089.55 9455.95,6014.05 9490,5980 9570,5980 9680,6090 10440,6090 10505,6155 10505,6530 10540,6565 10695,6565 10745,6615 10745,6650 10790,6695 11360,6695 v1(11445,6610) ; U13.8@11498.31,5611.26 11581.26,5611.26 11610,5640 11610,6445 v1(11540,6515)
  Bottom Layer w10: v1(11445,6610) v1(11540,6515)
INT_RFID: U1.42 URFID.23 | length 2021.1
  Top Layer w10: U1.42@9486.95,6089.55 9486.95,6013.05 9500,6000 9555,6000 9670,6115 10145,6115 10250,6220 10250,6690 v1(10245,6695) ; v1@9985,6920 v1(9990,6920) 9985,6925 9985,7005 9995.32,7015.31 URFID.23@10040,7015.31
  Bottom Layer w10: v1(9990,6920) 9990,6740 10015,6715 10230,6715 10245,6700 v1(10245,6695)
JBATT_3.7V: F2.1 JBOTTOM.10 | length 8180.7
  Top Layer w50: v2(8765,5170) 8850,5085 10150,5085 ; 10155,5085 10225,5085 10275,5135 F2.1@10275,5337.48
  Bottom Layer w50: v2(8765,5170) 8652.5,5282.5 8652.5,5382.5 8270,5765 8270,9110 8810.91,9650.91 9056.11,9650.91 9057.02,9650 9815,9650 10109,9944 10109,10028.48 JBOTTOM.10@10107.17,10030.32
JBATT_7.4V: F1.1 JBOTTOM.9 | length 7136.4
  Top Layer w50: v2(8270,5655) 8587.52,5337.48 F1.1@9545,5337.48
  Bottom Layer w50: v2(8270,5655) 8200,5725 8200,9150 8765,9715 9750,9715 10007.17,9972.17 JBOTTOM.9@10007.17,10030.32
JMTRLA: C34.1 C35.2 JBOTTOM.2 U12.2 | length 793.7
  Top Layer w12: U12.2@9085.2,9910 U12.2@9084.17,9911.02 9153.98,9911.02 9160,9905 9160,9875
  Top Layer w20: 9160,9875 9160,9835 9225,9770 9375,9770 9425,9820 9425,9920 9398.5,9946.5 C34.1@9365,9946.5 ; JBOTTOM.2@9305,10030 9286.5,10011.5 C35.2@9286.5,9955 9350,9955 C34.1@9360,9945
JMTRLB: C35.1 C38.2 JBOTTOM.1 U12.4 | length 292.4
  Top Layer w12: U12.4@9084.17,9962.2 9217.2,9962.2 C35.1@9220,9965
  Top Layer w20: JBOTTOM.1@9205,10030 9223.5,10011.5 C35.1@9223.5,9955 9223.5,9886.5 C38.2@9225,9885 ; C35.1@9218.5,9948.5 C35.1@9220,9950
JMTRRA: C26.1 C27.2 JBOTTOM.15 U9.2 | length 377.3
  Top Layer w12: 10650.46,10010.46 10678.98,10038.98 U9.2@10735.83,10038.98
  Top Layer w20: C26.1@10580,9880 C27.2@10580,9955 ; JBOTTOM.15@10610,10030 10581.5,10001.5 C27.2@10581.5,9955 10640,9955 10650.46,9965.46 10650.46,10010.46
JMTRRB: C27.1 C28.2 JBOTTOM.14 U9.4 | length 882.1
  Top Layer w20: C28.2@10440,9941.5 10506.5,9941.5 C27.1@10520,9955 ; C28.2@10445,9940 10410,9940 10365,9895 10365,9815 10413,9767 10572,9767 10640,9835 10640,9895 10678.46,9933.46 10678.46,9972.51 10693.04,9987.09 10735.13,9987.09 U9.4@10735.83,9987.8 ; JBOTTOM.14@10500,10025 10518.5,10006.5 C27.1@10518.5,9955
JSPKA: JBOTTOM.7 U12.7 | length 846.9
  Top Layer w12: U12.7@9084.17,10038.98 9128.98,10038.98 9140,10050 9140,10105 9790,10105 9806.38,10088.62 JBOTTOM.7@9806.38,10030.32
JSPKB: JBOTTOM.6 U12.5 | length 742.1
  Top Layer w12: U12.5@9084.17,9987.8 9142.8,9987.8 9160,10005 9160,10070 9170,10080 9695,10080 9707.95,10067.05 JBOTTOM.6@9707.95,10030.32
LEDS_3V: U1.24 ULED_INNER.4 | length 2717.5
  Top Layer w8: v4(9545,8470) 9688.94,8568.94 ULED_INNER.4@9813.39,8568.94
  Top Layer w12: U1.24@9147.95,6460.55 9104.45,6460.55 9070,6495 9070,6755 9247.78,6932.78 9502.78,6932.78 9545,6975 v1(9545,7915)
  Bottom Layer w8: v1@9545,7910 v1(9545,7915) v4(9545,8470)
MIC: R1.2 R8.2 U2.7 | length 1850.3
  Top Layer w12: R1.2@9340,5885 R1.2@9340,5881.54 9340,5810 9360,5790 9460,5790 9660,5990 10440,5990 10595,6145 10595,6195 10610,6210 R8.2@10660,6210 ; R8.2@10655,6205 10655,6140 10735,6060 U2.7@10735,5994.33
MISO: J1.1 JSPI.2 U1.2 U3.2 URFID.31 | length 4546
  Top Layer w10: U1.2@9637.95,6208.55 9573.55,6208.55 9570,6205 9570,6155 9585,6140 10115,6140 10206.34,6231.34 10206.34,6433.66 v1(10205,6435) 10206.34,6436.34 URFID.31@10206.34,6947.4 ; v1(10330,6435) 10330,6465 10585,6720 10585,7160 10635,7210 10740,7210 10760.04,7230.04 U3.2@10760.04,7335.54 ; v1(10690,5590) 10730,5550 10730,5300 J1.1@10775,5255
  Bottom Layer w10: v1(10205,6435) 10210,6430 10215,6435 v1(10330,6435) 10385,6435 10410,6410 10410,5775 10570,5615 10665,5615 v1(10690,5590) ; J1.1@10775,5245 J1.1@10775,5255.85 10875.85,5155 10945,5155 JSPI.2@11005,5215
MOSI: J1.4 JSPI.3 U1.1 U3.5 URFID.30 | length 3985
  Top Layer w10: U1.1@9637.95,6177.55 10090,6177.55 10165,6252.55 v1(10165,6370) 10165,6585 10186.65,6606.65 URFID.30@10186.65,6947.4 ; v1(10315,6370) 10315,6375 10360,6420 10360,6465 10660.04,6765.04 U3.5@10660.04,7038.85 ; v1(10615,5585) 10670,5530 J1.4@10670,5360
  Bottom Layer w10: v1(10165,6370) v1(10315,6370) 10340,6370 10385,6325 10385,5765 10565,5585 v1(10615,5585) ; J1.4@10675,5355.85 10675,5395 10695,5415 10870,5415 11070,5215 JSPI.3@11105,5215
MTR_L_DIR: U1.30 U4.11 U14.1 | length 1953.5
  Top Layer w8: v1(8495,6335) 8495,6320 8512,6303 8662.46,6303 8705.46,6260 8835,6260 8895,6200 9000,6200 9071.55,6271.55 U1.30@9147.95,6271.55 ; v1@8510,6705 8510,6865 8560,6915 8830,6915 8855,6940 8855,7085 8835,7105 U14.1@8789.49,7105 ; 8530,6690 U4.11@8601.02,6690
  Bottom Layer w8: v1(8495,6335) 8495,6675 v1(8520,6700) v1@8525,6700
MTR_L_EN: U1.14 U14.2 U14.5 | length 1678.3
  Top Layer w10: U14.5@8789.49,7305 8735,7305 8710,7280 8710,7180 8735,7155 U14.2@8789.49,7155 8910,7155 8925,7140 v1(8925,6675) ; v1(9450,6440) 9455,6440 9486.95,6471.95 U1.14@9486.95,6579.55
  Bottom Layer w10: v1(8925,6675) 8925,6655 8940,6640 8995,6640 9173,6462 9383.46,6462 9405.46,6440 v1(9450,6440)
MTR_L_ENC: C47.2 R21.1 U1.34 U11.3 | length 4566.1
  Top Layer w12: v1(9185,6595) 9185,6540 9240,6485 v1(9240,6410) ; U1.34@9235.95,6089.55 9235.95,6145.95 9260,6170 v1(9260,6205) ; v1(10260,7975) 10298.46,8013.46 11205,8013.46 ; U11.3@11251.12,8638.47 11205,8592.35 11205,8013.46 ; C47.2@11340,7953.5 11280.04,7953.5 11280,7953.46 11280,7965 11231.54,8013.46 11205,8013.46
  Bottom Layer w12: v1(9185,6595) 9170,6610 9170,6845 9315,6990 9460,6990 9530,7060 9530,7765 9630,7865 10150,7865 v1(10260,7975) ; v1(9240,6410) 9240,6395 9215,6370 9215,6250 v1(9260,6205)